# EAGLE board to_be_corrected (EAGLE 7.2.0)
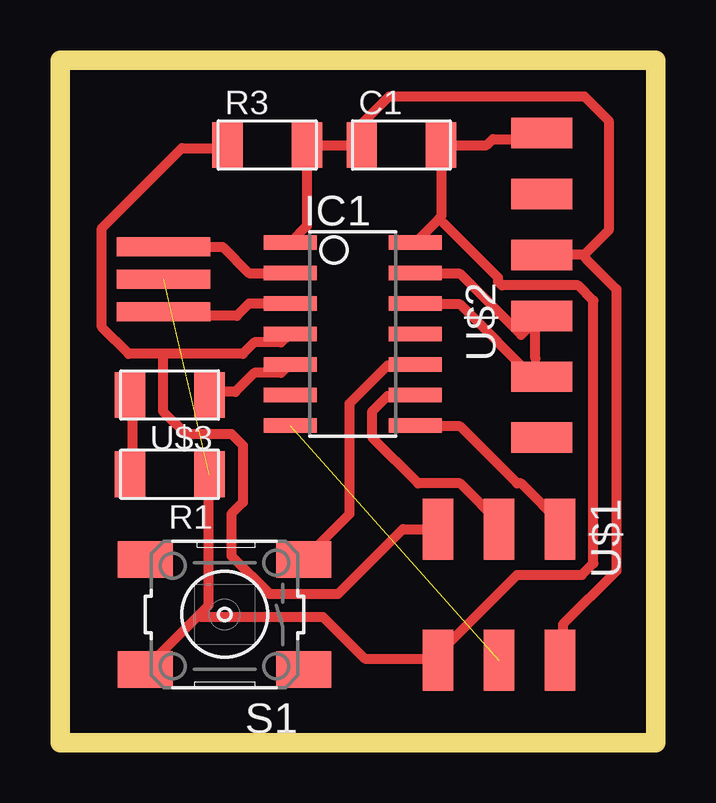
[diagram p0: board, top side]

Size 24.82 x 28.44 mm. Coordinates in mm from the lower left corner, seen from the top.
Outline: 0,0 24.82,0 24.82,28.44 0,28.44 0,0
Copper layers (1*16): Top 0.035mm / dielectric 1.5mm / Bottom 0.035mm
Design rules "default *": minimum track width 16mil, minimum drill 24mil, track to track 16mil, track to pad 16mil, pad to pad 16mil, via to via 16mil, smd to smd 0mil, copper to edge 40mil, drill to drill 8mil, minimum pad ring 10mil, minimum via ring 8mil, stop-mask expansion 4mil, vias tented up to drill 0mil, thermal gap 10mil

## Footprints (pad centres in the part's own frame; a part is rotated, then mirrored left to right if it is on the bottom)
C1206FAB = smd 1.27 x 1.905: 1 -1.651,0; 2 1.651,0
SOIC14 = smd 0.61 x 2.21: 1 -3.81,-2.603; 2 -2.54,-2.603; 3 -1.27,-2.603; 4 0,-2.603; 5 1.27,-2.603; 6 2.54,-2.603; 7 3.81,-2.603; 8 3.81,2.603; 9 2.54,2.603; 10 1.27,2.603; 11 0,2.603; 12 -1.27,2.603; 13 -2.54,2.603; 14 -3.81,2.603
R1206FAB = smd 1.27 x 1.905: 1 -1.651,0; 2 1.651,0
6MM_SWITCH = smd 2.286 x 1.524: 1 -3.302,2.286; 2 3.302,2.286; 3 -3.302,-2.286; 4 3.302,-2.286
2X03SMD = smd 2.54 x 1.27: 1 -2.54,2.54; 2 2.92,2.54; 3 -2.54,0; 4 2.92,0; 5 -2.54,-2.54; 6 2.92,-2.54
1X06SMD = smd 2.54 x 1.27: 1 0,6.35; 2 0,3.81; 3 0,1.27; 4 0,-1.27; 5 0,-3.81; 6 0,-6.35
LED1206FAB = smd 1.27 x 1.905: 1 -1.651,0; 2 1.651,0
EFOBM = smd 0.8 x 3.9: 1 -1.35,0; 2 0,0; 3 1.35,0

## Placement (x,y rotation side)
C1  1uF  [C1206FAB]  14.22,24.89 0 top
IC1  ATTINY44-SSU  [SOIC14]  12.19,17.02 270 top
R1  330  [R1206FAB]  4.57,11.18 180 top
R3  10K  [R1206FAB]  8.64,24.89 0 top
S1  [6MM_SWITCH]  6.86,5.33 180 top
U$1  AVRISPSMD  [2X03SMD]  18.29,6.35 270 top
U$2  FTDI-SMD-HEADER  [1X06SMD]  20.07,19.05 0 top
U$3  LEDFAB1206  [LED1206FAB]  4.57,14.48 180 top
U$4  RESONATOR  [EFOBM]  4.32,19.3 270 top

## Library data of the parts
C1 IC1 R1 R3 S1 U$1-U$4 = fab

## Nets
GND: C1.2 IC1.14 R1.1 S1.2 U$1.6 U$2.1 U$4.2
N$1: IC1.5 U$3.1
N$2: IC1.13 U$2.4
N$3: IC1.4 R3.1 U$1.5
N$4: IC1.3 U$4.3
N$5: IC1.2 U$4.1
N$6: IC1.8 U$1.1
N$7: IC1.7 U$1.4
N$8: IC1.9 U$1.3
N$10: R1.2 U$3.2
N$13: IC1.10 S1.3
N$14: IC1.12 U$2.5
VCC: C1.1 IC1.1 R3.2 U$1.2 U$2.3

## Tracks (layer width: path | path; a pad name or v marks a point on that pad's centre or on a via)
GND  (1 unrouted)
  Top 0.406: U$2.1 19.81,25.15 18.03,25.15 17.78,24.89 C1.2 15.88,21.91 15.8,21.83 | 15.8,21.83 IC1.14 | 5.79,5.32 3.65,3.17 S1.2 | 5.79,5.32 6.19,5.71 6.19,11.11 R1.1 | 5.79,5.32 5.87,5.24 10.95,5.24 12.7,3.49 15.72,3.49 U$1.6 15.72,3.65 19.05,6.99 21.75,6.99 22.23,7.46 22.23,18.41 21.59,19.05 18.41,19.05 18.26,19.21 18.26,19.37 15.8,21.83
N$1
  Top 0.406: U$3.1 6.35,14.61 7.3,14.61 8.1,15.4 9.21,15.4 9.53,15.72 IC1.5
N$2
  Top 0.406: IC1.13 14.92,19.53 16.67,19.53 19.21,16.99 20,17.78 U$2.4
N$3
  Top 0.406: 4.29,16.19 7.62,16.19 8.1,16.67 9.21,16.67 9.53,16.99 IC1.4 | 4.29,16.19 2.86,16.19 1.75,17.3 1.75,21.43 5.08,24.77 6.99,24.77 R3.1 | U$1.5 14.29,8.89 11.59,6.19 8.73,6.19 7.14,7.78 7.14,9.53 7.62,10 7.62,12.38 7.14,12.86 5.24,12.86 4.29,13.81 4.29,16.19
N$4
  Top 0.406: IC1.3 7.87,18.29 7.37,17.78 4.49,17.78 U$4.3
N$5
  Top 0.406: U$4.1 6.78,20.65 7.87,19.56 IC1.2
N$6
  Top 0.406: IC1.8 14.92,13.18 16.67,13.18 19.05,10.79 19.21,10.79 20.95,9.05 20.8,8.89 U$1.1
N$7  (1 unrouted)
N$8
  Top 0.406: IC1.9 14.76,14.45 13.65,14.45 13.02,13.81 13.02,12.7 14.92,10.79 16.67,10.79 18.41,9.05 18.26,8.89 U$1.3
N$9
  Top 0.406: 19.81,16 19.81,17.27
N$10
  Top 0.406: R1.2 3.02,11.27 3.02,14.45 U$3.2
N$13
  Top 0.406: S1.3 12.06,9.53 12.06,14.13 13.65,15.72 14.76,15.72 IC1.10
N$14
  Top 0.406: IC1.12 14.92,18.26 16.67,18.26 19.84,15.08 20,15.24 U$2.5
VCC
  Top 0.406: IC1.1 10.29,21.53 R3.2 C1.1 12.57,25.78 13.72,26.92 21.84,26.92 22.86,25.91 22.86,21.34 21.84,20.32 | 21.84,20.32 U$2.3 | U$1.2 20.95,3.49 20.95,4.92 23.18,7.14 23.18,18.89 21.91,20.16 21.84,20.32